# Altium PCB Daughter Board.PcbDoc
Units mil, origin at the board's own origin, x right, y up, seen from the top; angles counter-clockwise.
Board outline 510 x 625 mil, 2 copper layers (Top Layer, Bottom Layer); 10 components, 8 nets, 34 pads, 5 vias.
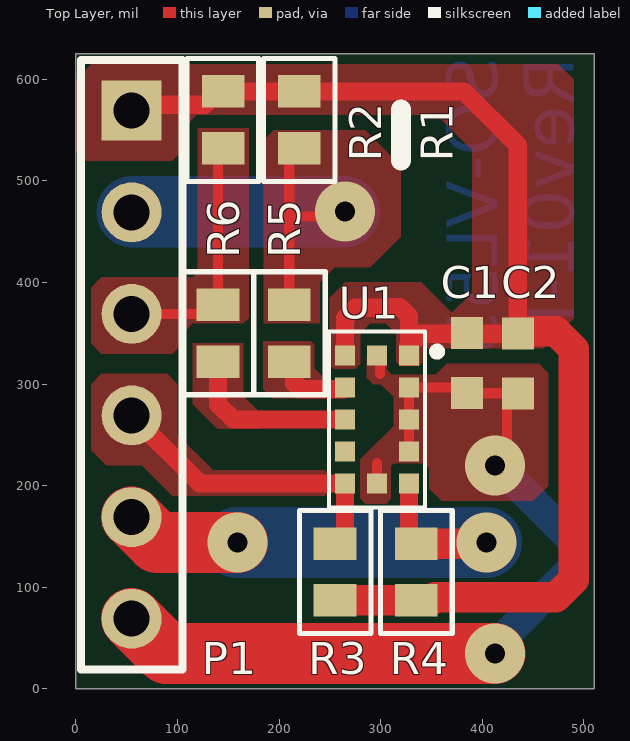
[diagram p0: Top Layer view]
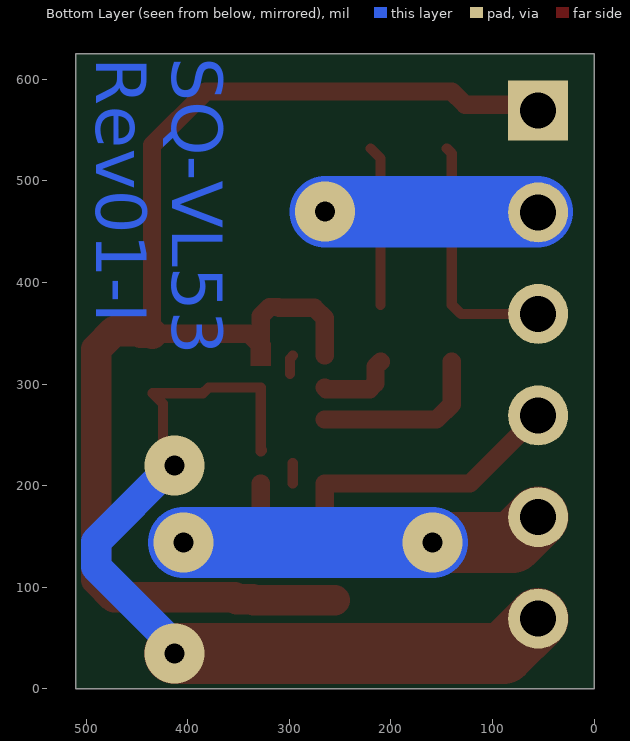
[diagram p1: Bottom Layer view, seen from below]
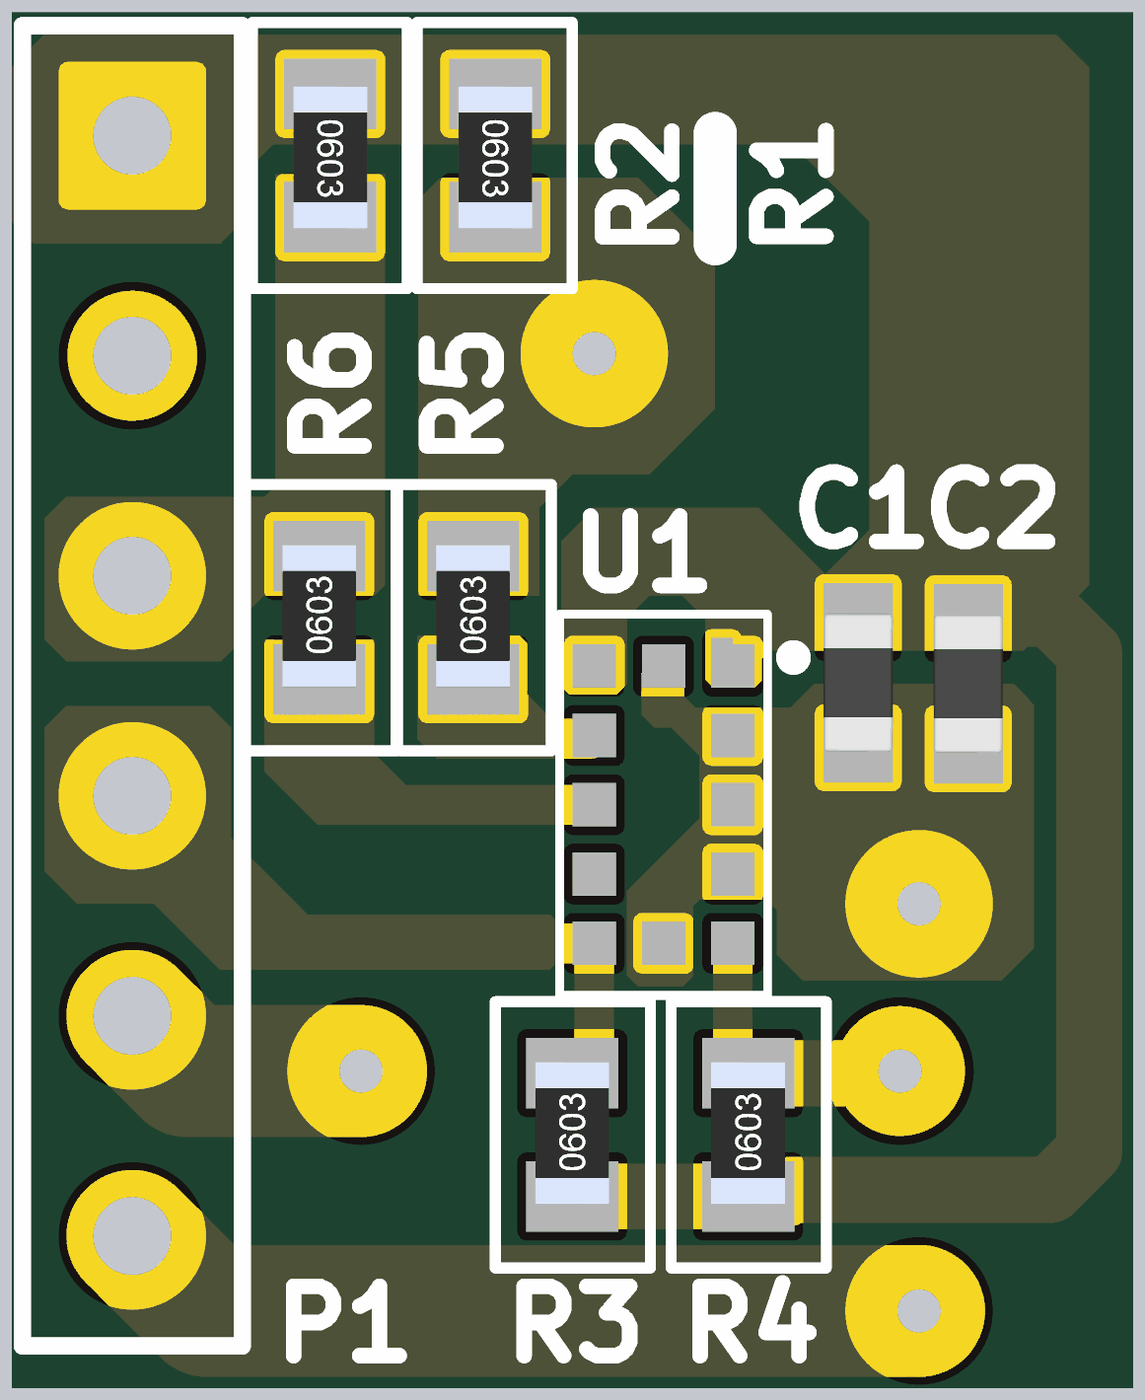
[diagram p2: 3D render of the assembled board from above, using the file's embedded part models]

## Layer stack, top to bottom
Top Solder: solder mask 0.4, Solder Resist, Dk 3.5
Top Layer: signal copper 1.4
Dielectric 1: dielectric 12.6, FR-4, Dk 4.8
Bottom Layer: signal copper 1.4
Bottom Solder: solder mask 0.4, Solder Resist, Dk 3.5

## Board outline
0,0 510,0 510,625 0,625

## Design rules (kind name [scope] priority, off if disabled: settings)
Clearance [All] p1: gap=5 ignorepadtopadclearanceinfootprint=FALSE except(0: Arc-Hole Track-Hole SMDPad-Hole THPad-Hole Via-Hole Fill-Hole Poly-Hole Region-Hole Text-Hole)
MinimumSolderMaskSliver [All] p1: minsoldermaskwidth=2
PolygonConnect [All] p1: connectstyle=Direct reliefconductorwidth=10 reliefentries=4 polygonreliefangle="90 Angle" airgapwidth=10
RoutingVias [All] p1: holewidth=28 width=50 viastyle="Through Hole" minholewidth=28 minwidth=50 maxholewidth=28 maxwidth=50
SilkToSilkClearance [All] p1: silktosilkclearance=2
SilkToSolderMaskClearance [IsPad] p1: minsilkscreentomaskgap=2 clearancetoexposedcopper=TRUE
SolderMaskExpansion [All] p1: expansion=4 istentingtop=FALSE
Width [All] p1: maxlimit=100 minlimit=10 preferedwidth=10 minimp=50.000000 maximp=50.000000 favimp=50.000000
27 further rules are at their usual default settings.

## Components (designator, comment, footprint, x,y, rotation, side; value= is the part's Value field where it differs from the comment)
C1 "100nF, 25V" WCAP-CSGP_0603_H=0.8mm_Reflow 385,320.47 r90 top
C2 "4.7uF, 10V" WCAP-CSGP_0603_H=0.8mm_Reflow 435,320 r90 top
P1 "Header 6" HDR1X6 55,569.06 r270 top
R1 "2K" SM/R_0603 220,560 r270 top
R2 "2K" SM/R_0603 145,560 r270 top
R3 "2K" SM/R_0603 255,115 r90 top
R4 "2K" SM/R_0603 335,115 r90 top
R5 "NM" SM/R_0603 210,350 r90 top
R6 "NM" SM/R_0603 140,350 r90 top
U1 "VL53L4CD" VL53L4 327.99,327.99 r180 top

## Footprints (in the part's own frame and the unit in brackets; to place one, negate y for a bottom-side part, rotate by r counter-clockwise, add the part's x,y. Pads: shape width x height; smd on the part's side, far side on the other; paste and mask are expansions set on the pad)
HDR1X6 [mm] "Connector; Header; 6 Position"
  rect 1.5x1.5 hole 0.9: 1(0,0)
  round 1.5 hole 0.9: 2(2.54,0) 3(5.08,0) 4(7.62,0) 5(10.16,0) 6(12.7,0)
  silkscreen extent -1.27,-1.27 13.97,1.27
SM/R_0603 [mil]
  rect 32x42 smd: 1(-28,0) 2(28,0)
  silkscreen extent -61,-36 61,35, body extent -31,-17 33,17, height 16
VL53L4 [mm] "4.4 x 2.4 x 1mm size"
  rect 0.5x0.5 smd paste+0 mask+0: 1(0,0)
  rect 0.5x0.5 smd: 2(0,0.8) 3(0,1.6) 4(0,2.4) 5(0,3.2) 6(0.8,3.2) 7(1.6,3.2) 8(1.6,2.4) 9(1.6,1.6) 10(1.6,0.8) 11(1.6,0) 12(0.8,0)
  Top Layer region: -0.25,0.25 0.25,0.25 0.25,-0.325 0,-0.325 0,-0.25 -0.25,-0.25
  silkscreen extent -0.8,-0.6 2,3.8, body extent -0.4,-0.6 2,3.8, height 1
WCAP-CSGP_0603_H=0.8mm_Reflow [mm] "Ceramic Capacitors, body 1.6x0.8mm"
  rect 0.8x0.8 smd: 1(-0.75,0) 2(0.75,0)
  body extent -0.8,-0.4 0.8,0.4, height 0.8

## Part data
C1: library part 885012206071, "WCAP-CSGP Multilayer Ceramic Chip Capacitor, General Purpose, size 0603, X7R, 100nF, 25V", Capacitance=100nF, Capacitance Tolerance=+/-10%, Isolation Resistance=>=5GOhm, Manufacturer="Wurth Elektronik", Operating Temperature="-55 to +125degC", Rated Voltage=25VDC, Ceramic Type=X7R, ComponentLink1Description=Manufacturer, ComponentLink1URL=http://www.we-online.de, ComponentLink2Description=Datasheet, ComponentLink2URL=https://www.we-online.com/catalog/datasheet/885012206071.pdf, Dissipation Factor=#NAME?, Height=0.8mm, Manufacturer Part Number=885012206071, Mounting Technology=SMT, Packaging="Tape and Reel", Published Date="May 2020", Size=0603, Technical Reference=X7R0603104K025DFCT10000
C2: library part 885012106012, "WCAP-CSGP Multilayer Ceramic Chip Capacitor, General Purpose, size 0603, X5R, 4.7uF, 10V", Capacitance=4.7uF, Capacitance Tolerance=+/-20%, Isolation Resistance=>=0.02GOhm, Manufacturer="Wurth Elektronik", Operating Temperature="-55 to +85degC", Rated Voltage=10VDC, Ceramic Type=X5R, ComponentLink1Description=Manufacturer, ComponentLink1URL=http://www.we-online.de, ComponentLink2Description=Datasheet, ComponentLink2URL=https://www.we-online.com/catalog/datasheet/885012106012.pdf, Dissipation Factor=#NAME?, Height=0.8mm, Manufacturer Part Number=885012106012, Mounting Technology=SMT, Packaging="Tape and Reel", Published Date="May 2020", Size=0603, Technical Reference=X5R0603475M010DFCT10000
P1: library part 61300611121, "WR-PHD Pin Header, THT, Vertical, pitch 2.54mm, 1 Row, 6P", Contact Resistance=20mΩ, Manufacturer="Wurth Elektronik", Operating Temperature Max=105°C, Operating Temperature Min=-40°C, Rated Current=3A, Withstanding Voltage=500V, Working Voltage=250V, Category="Board-to-Board Connectors", ComponentLink1Description="Website Link", ComponentLink1URL=https://www.we-online.com/redexpert/article/61300611121?ad, ComponentLink2Description="Datasheet Link", ComponentLink2URL=https://www.we-online.com/redexpert/spec/61300611121?ad, Gender="Pin Header", Manufacturer Part Number=61300611121, Match Code=WR-PHD, Mount="Through Hole", Number of Pins=6, Number of Rows=1, Orientation=Vertical, Packaging=Bag, Pitch=2.54mm
R1 R2 R3 R4 R5 R6: library part SMRes, "SMD Resistor", Resistor Type="FIXED RESISTOR", Category="Chip SMD Resistors", Mount="Surface Mount", Mounting=SMD, Number of Pins=2, Pricing 1="10=0.67400, 100=0.52000, 250=0.49300, 500=0.33100, 1000=0.28900 (USD)", RoHS=Yes, Stock 1=1

## Via types
v1: diameter 59.06, hole 19.68, Top Layer to Bottom Layer, 5 vias

## Nets (pads, with @x,y where several pads share a name; then routed paths per layer and width w, separated by ;. In a path a pad name is that pad's centre, name@x,y a point inside that pad or via, vN(x,y) a via of type N, cw(c..) or ccw(c..) an arc to the next point about the centre after c; other vN are vias at no path point)
GND: C1.1 C2.1 P1.6 U1.2 U1.3 U1.4 U1.6 U1.12 | length 915.4
  Top Layer w10: U1.6 296.5,222.25 ; U1.12 299.3,325.19 299.3,309.89 ; U1.4@326.73,234.76 U1.4 U1.3 327.99,291.65 U1.2 379.45,296.5 C1.1 434.53,290.94 424.25,280.67 424.25,244.85 412.68,233.27 v1(412.68,220)
  Top Layer w60: P1.6 89.06,35 v1(412.68,35)
  Bottom Layer w30: v1(412.68,35) 412.68,42.68 490.07,120.07 490.07,144.93 415,220 v1(412.68,220)
NetP1_4: P1.4 R3.2 U1.7 | length 300.9
  Top Layer w18: P1.4 122.06,202.01 U1.7 265,153 R3.2
NetP1_5: P1.5 R4.2 U1.5 | length 490.7
  Top Layer w10: v1@403,143 v1(404,144)
  Top Layer w18: U1.5 327.99,150 R4.2
  Top Layer w30: R4.2 v1@403,143
  Top Layer w60: P1.5 80.06,144 v1(159,144)
  Bottom Layer w70: v1(159,144) v1(404,144)
NetR5_1: R5.1 U1.10 | length 76.3
  Top Layer w18: R5.1 215,317 215,300.86 220.86,295 263.5,295 U1.10
NetR6_1: R6.1 U1.9 | length 173.2
  Top Layer w18: R6.1 140,280 155,265 U1.9
SCL: P1.2 R1.2 R5.2 | length 413.5
  Top Layer w10: R5.2 210,465 ; R1.2 210,522 210,465 ; v1@255,465 210,465
  Bottom Layer w10: P1.2 P1.2@55.47,469.53 ; v1@264.53,469.53 v1(265,470)
  Bottom Layer w70: P1.2@55.47,469.53 v1@264.53,469.53
SDA: P1.3 R2.2 R6.2 | length 244.8
  Top Layer w10: P1.3 131.06,369.06 R6.2 140,527 R2.2
Vcc: C1.2 C2.2 P1.1 R1.1 R2.1 R3.1 R4.1 U1.1 U1.11 | length 1387.7
  Top Layer w18: P1.1 60.94,575 127,575 140,588 R1.1 382,588 435,535 C2.2 385,349.53 339.68,349.53 327.99,337.83 ; U1.11 265,365 275,375 310,375 310.86,375.86 319.14,375.86 327.99,367.01 327.99,337.83 ; U1.1 327.99,337.83
  Top Layer w30: R3.1 R4.1 336,88 351.79,88 353.79,90 472.43,90 490,107.57 490,334.24 472.43,351.82 447.57,351.82 446.03,350.28 435.75,350.28 C2.2
pads on no net: U1.8

## Polygon pours and split planes (outlines as drawn)
NetP1_4 on Top Layer "NETP1_4_L01_P006" (solid, pour order 6): 15,300 25,310 90,310 100,300 100,250 135,215 245,215 250,210 250,195 245,190 95,190 65,220 30,220 15,235
NetR5_1 on Top Layer "NETR5_1_L01_P005" (solid, pour order 5): 184.57,295 193.7,285.87 217.12,285.87 249.67,285.87 249.67,300.33 234.57,315.43 234.57,342.01 184.57,342.01
NetR6_1 on Top Layer "NETR6_1_L01_P004" (solid, pour order 4): 115,340 165,340 165,288.2 180.1,273.11 180.1,255.93 139.07,255.93 115,280
SCL on Top Layer "SCL_L01_P003" (solid, pour order 3): 195,550 285,550 320,515 320,445 290,415 255,415 240,400 240,360 185,360 185,540
Vcc on Top Layer "VCC_L01_P001" (solid, pour order 1): 110,556.12 118.88,565 355,565 390,530 390,390 370,370 340,400 265,400 250,385 250,318.05 253.05,315 275,315 280,320 280,350 290,360 305,360 315.35,349.65 315.35,320.94 318.15,318.15 337.83,318.15 341.18,321.49 341.18,331.34 344.84,335 460,335 490,365 490,600 475,615 15,615 0,600 0,530 10,520 95,520 110,535
SDA on Top Layer "SDA_L01_P002" (solid, pour order 2): 120,410 115,405 25,405 15,395 15,340 25,330 95,330 105,340 105,350 115,360 165,360 170,365 170,551.69 120,551.69
GND on Top Layer "GND_L01_P000" (solid, pour order 0): 465,310.42 455.89,320 365,320 354.19,309.19 310.81,309.19 306.1,313.9 306.1,325.19 286.49,325.19 286.49,306.03 292.52,300 300,300 312.71,287.29 312.71,258.6 285.56,231.44 279.84,225.96 279.84,187.51 284.94,182.42 305.54,182.42 310,186.88 310,218.93 312.98,221.91 343.15,221.85 347.83,217.17 347.83,197.17 360,185 380,185 450,185 465,200

## Other copper
Bottom Layer:
  text "SQ-VL53 / Rev01-I" at 490,621.61 h50 r90

## Silkscreen, mask and mechanical layers (free items; w line width, h text height)
Top Overlay:
  lines w19.68: 320,520 320,570
Mechanical 1:
  the board outline again, w0.39